# Altium PCB STM32.PcbDoc
Units mil, origin at the board's own origin, x right, y up, seen from the top; angles counter-clockwise.
Board outline 1555 x 1630 mil, 4 copper layers (Top Layer, Int1 (GND), Int2 (PWR), Bottom Layer), stack 61.662 mil thick; 36 components, 27 nets, 170 pads, 55 vias.
Unrouted connection lines stored in the file: 2.
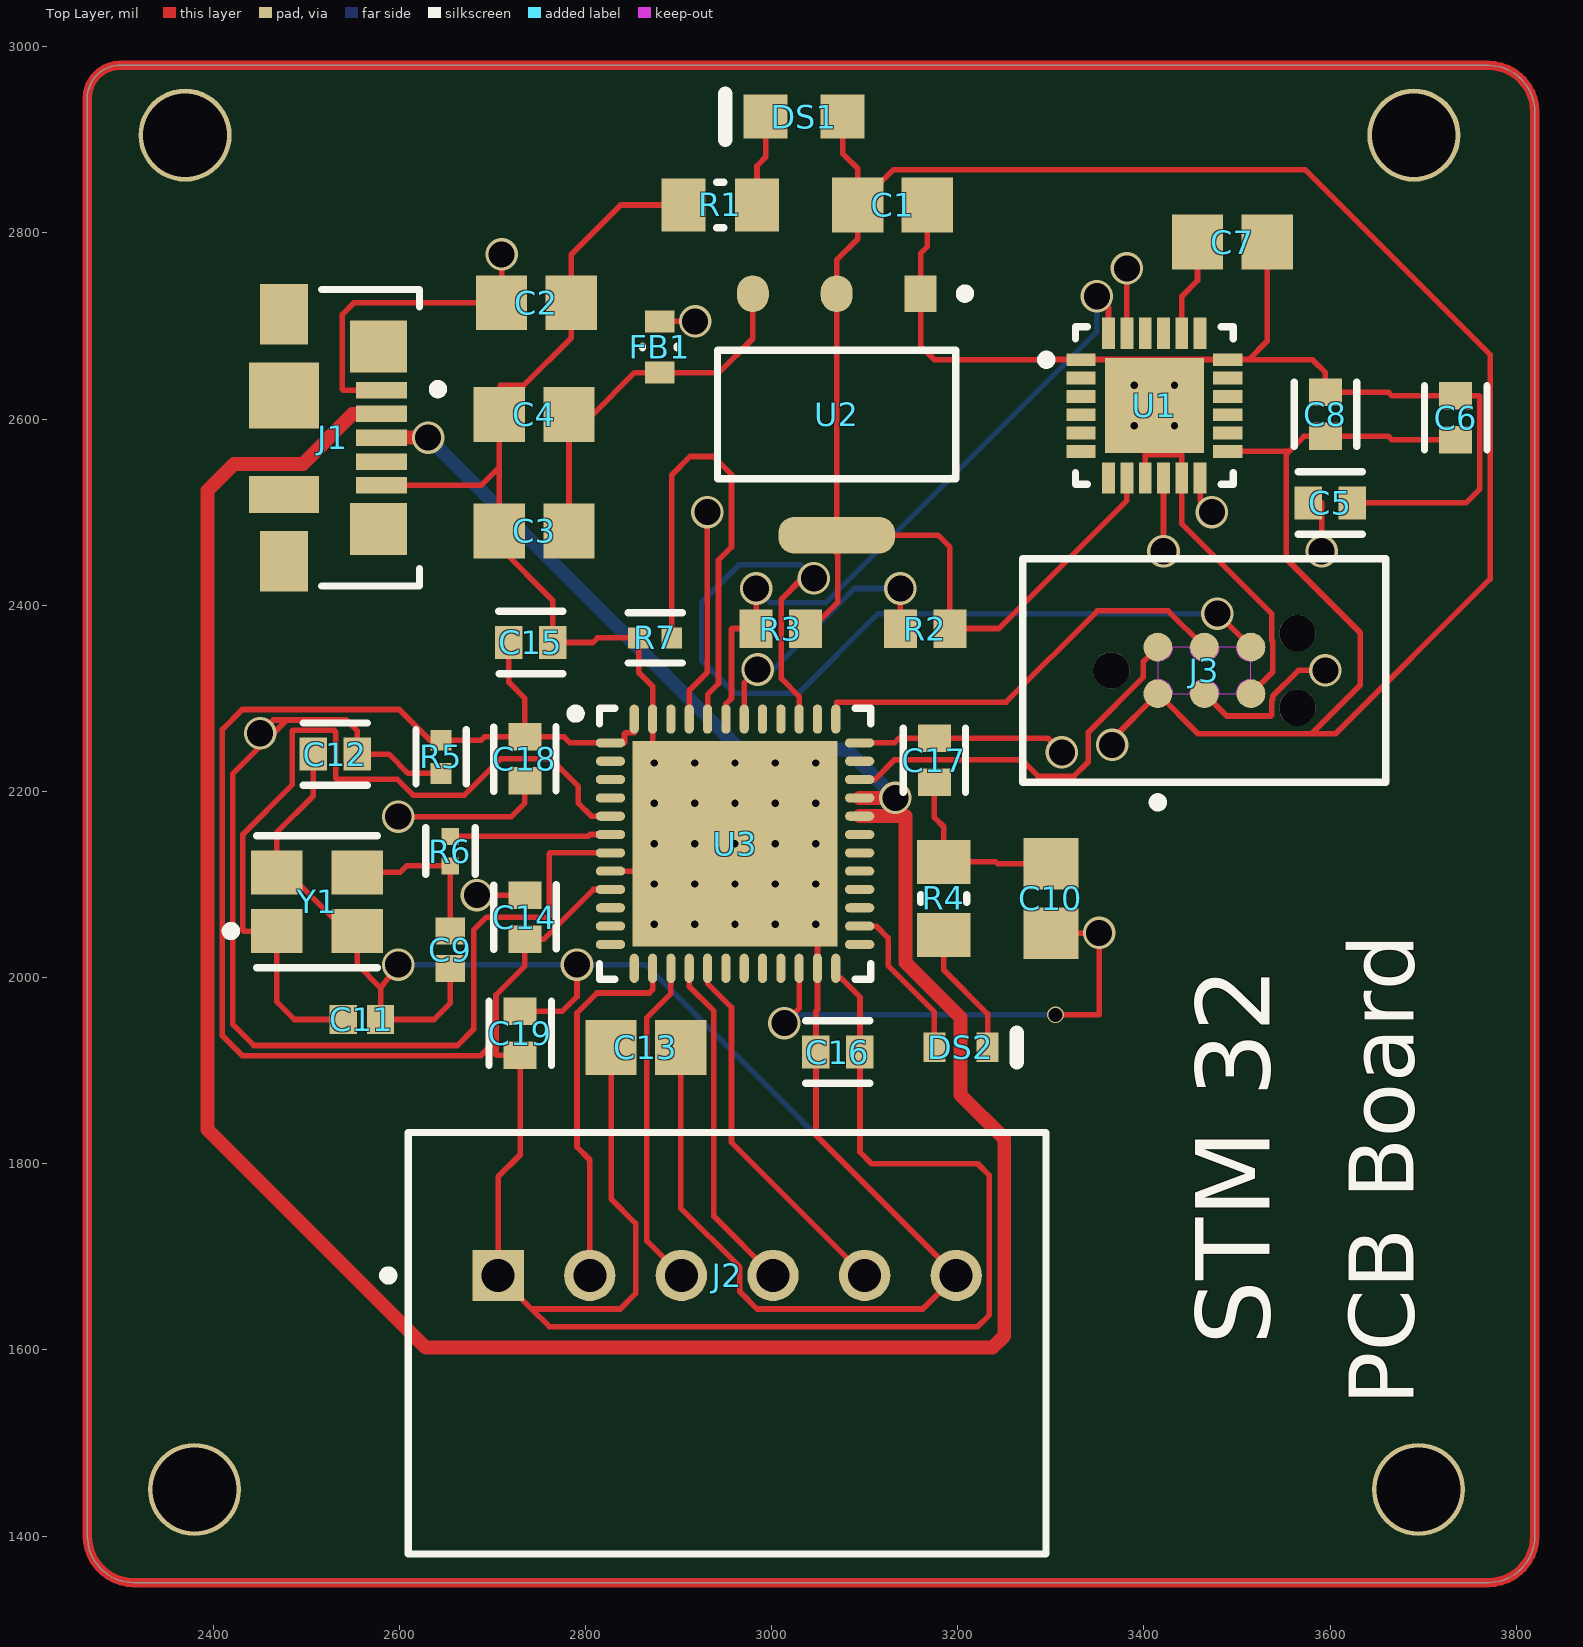
[diagram p0: Top Layer view]
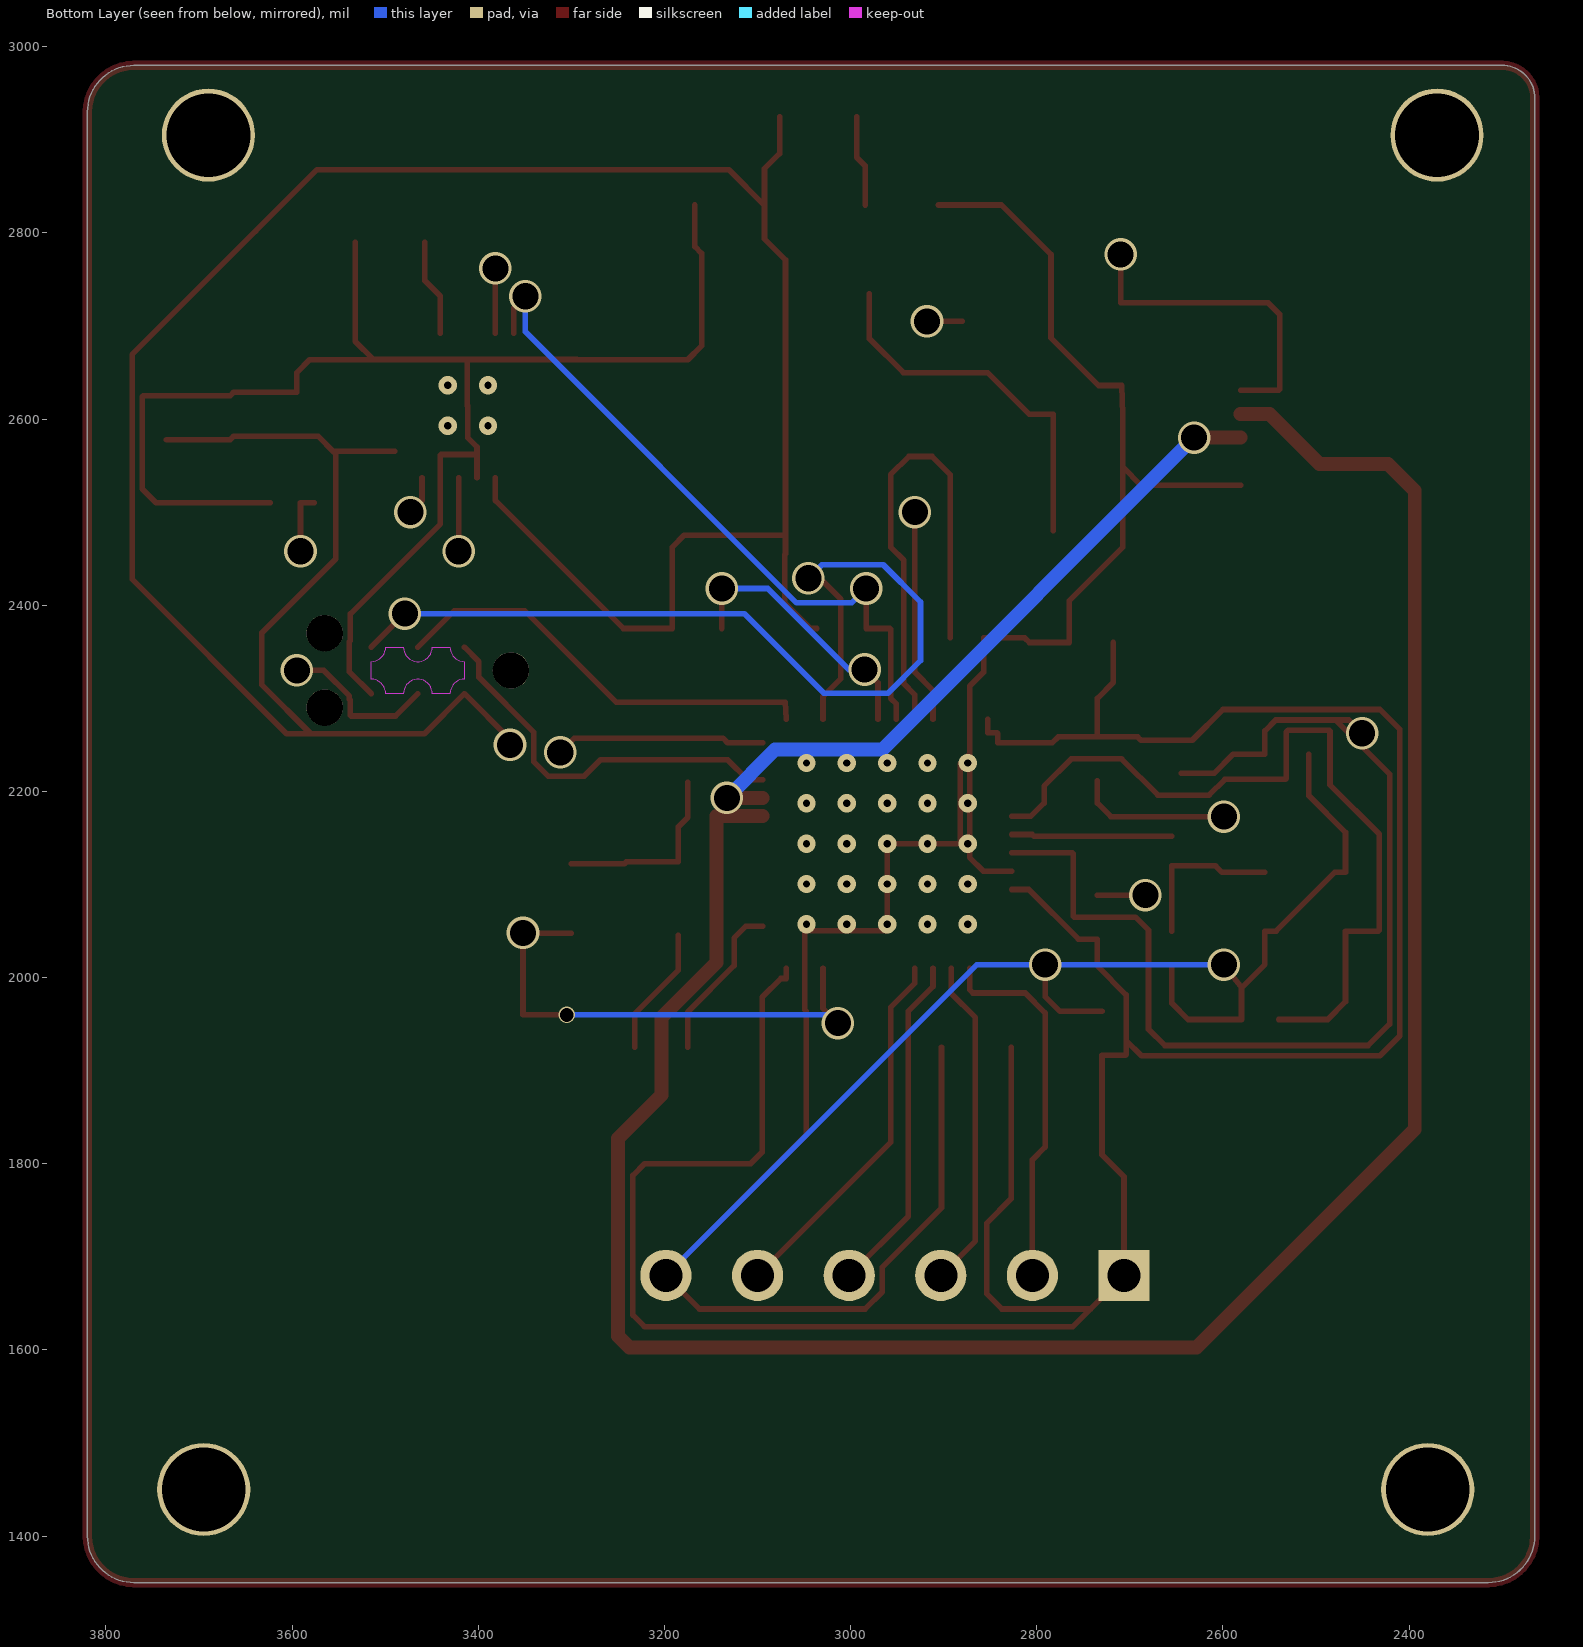
[diagram p1: Bottom Layer view, seen from below]
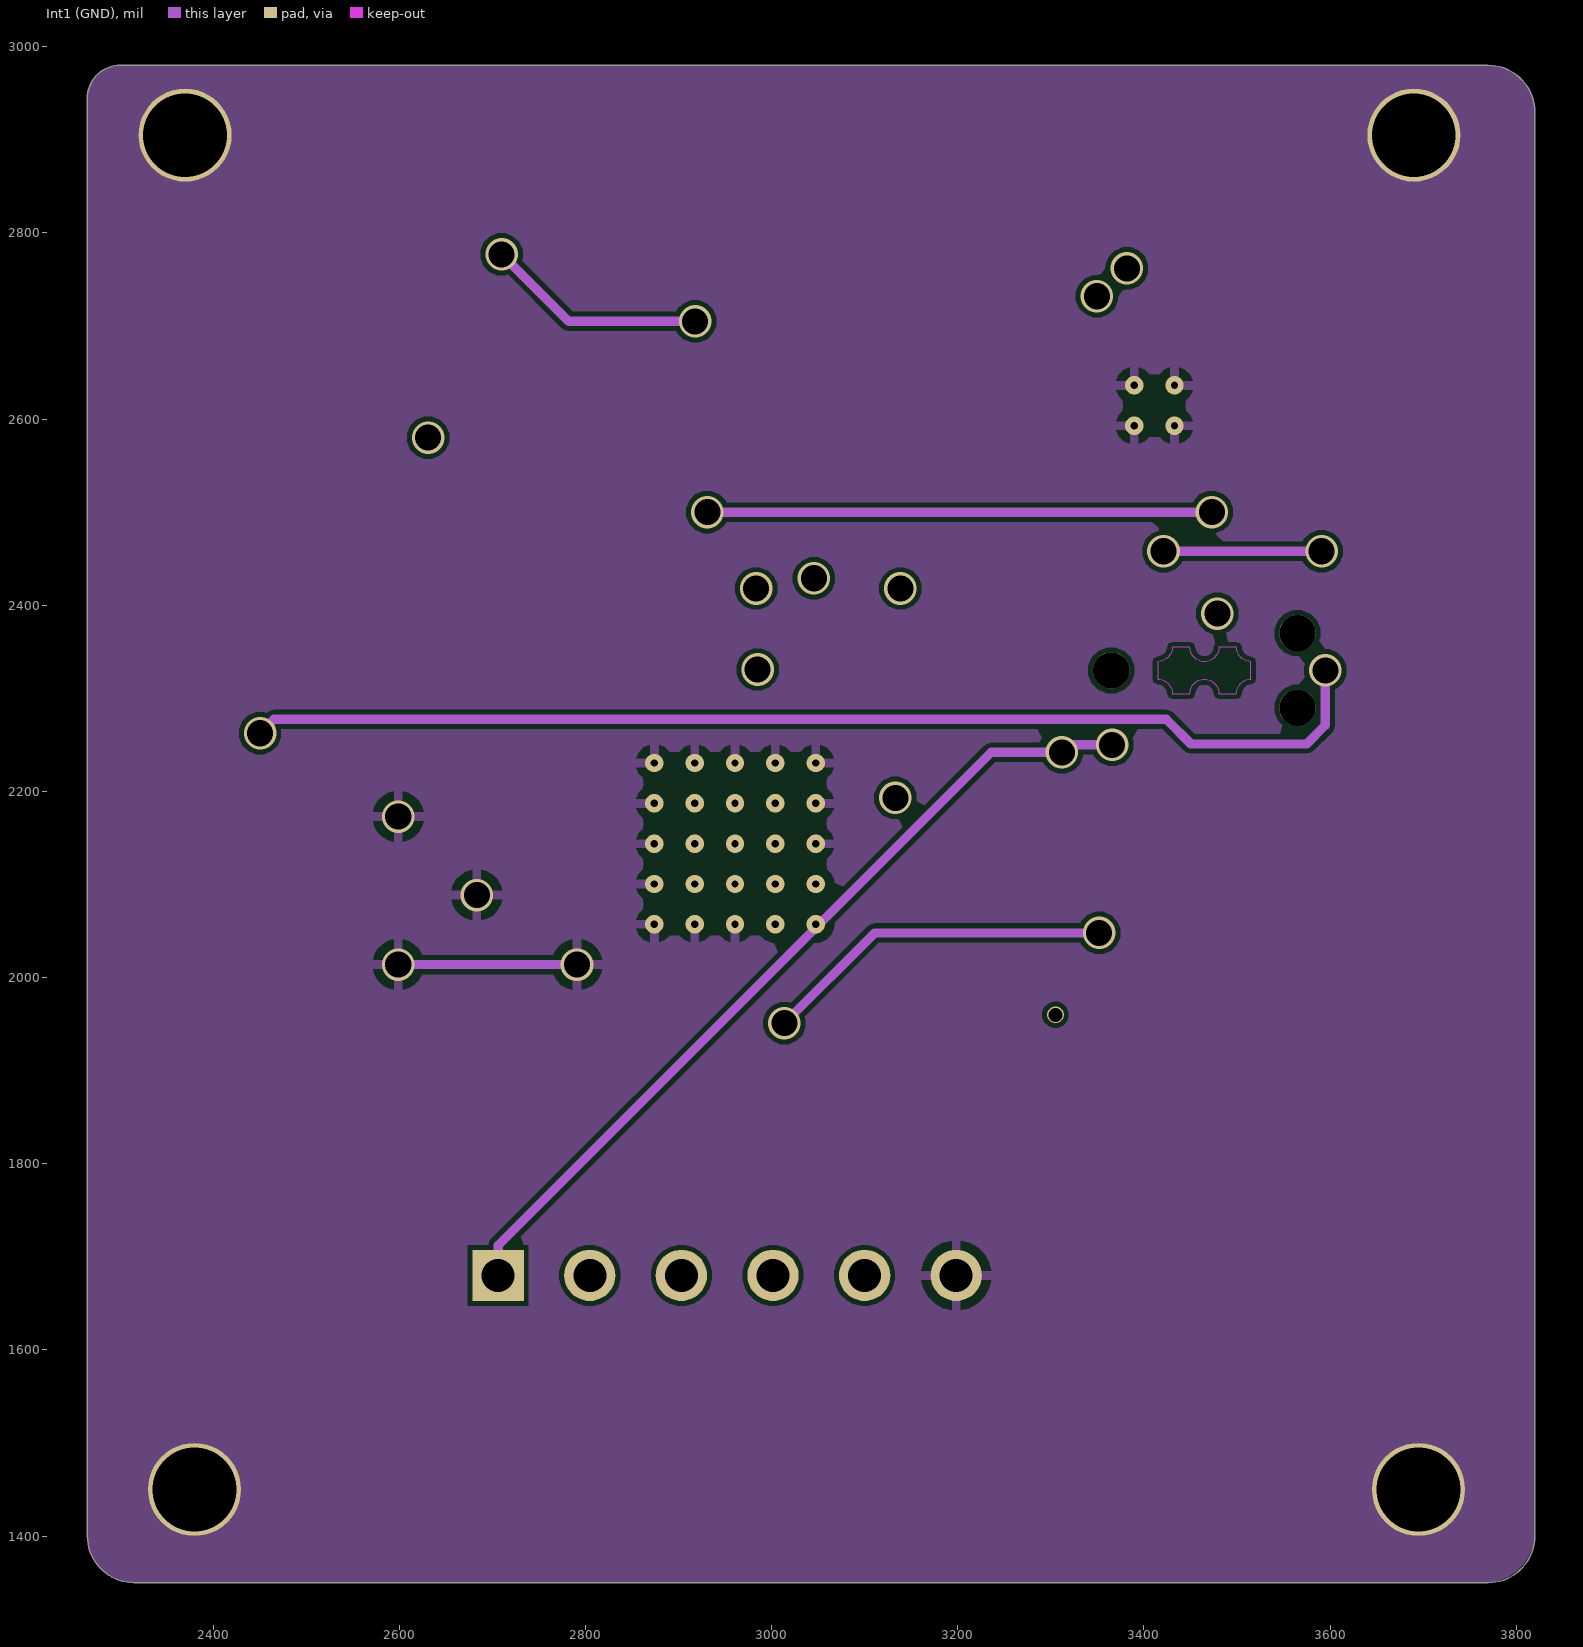
[diagram p2: Int1 (GND)]
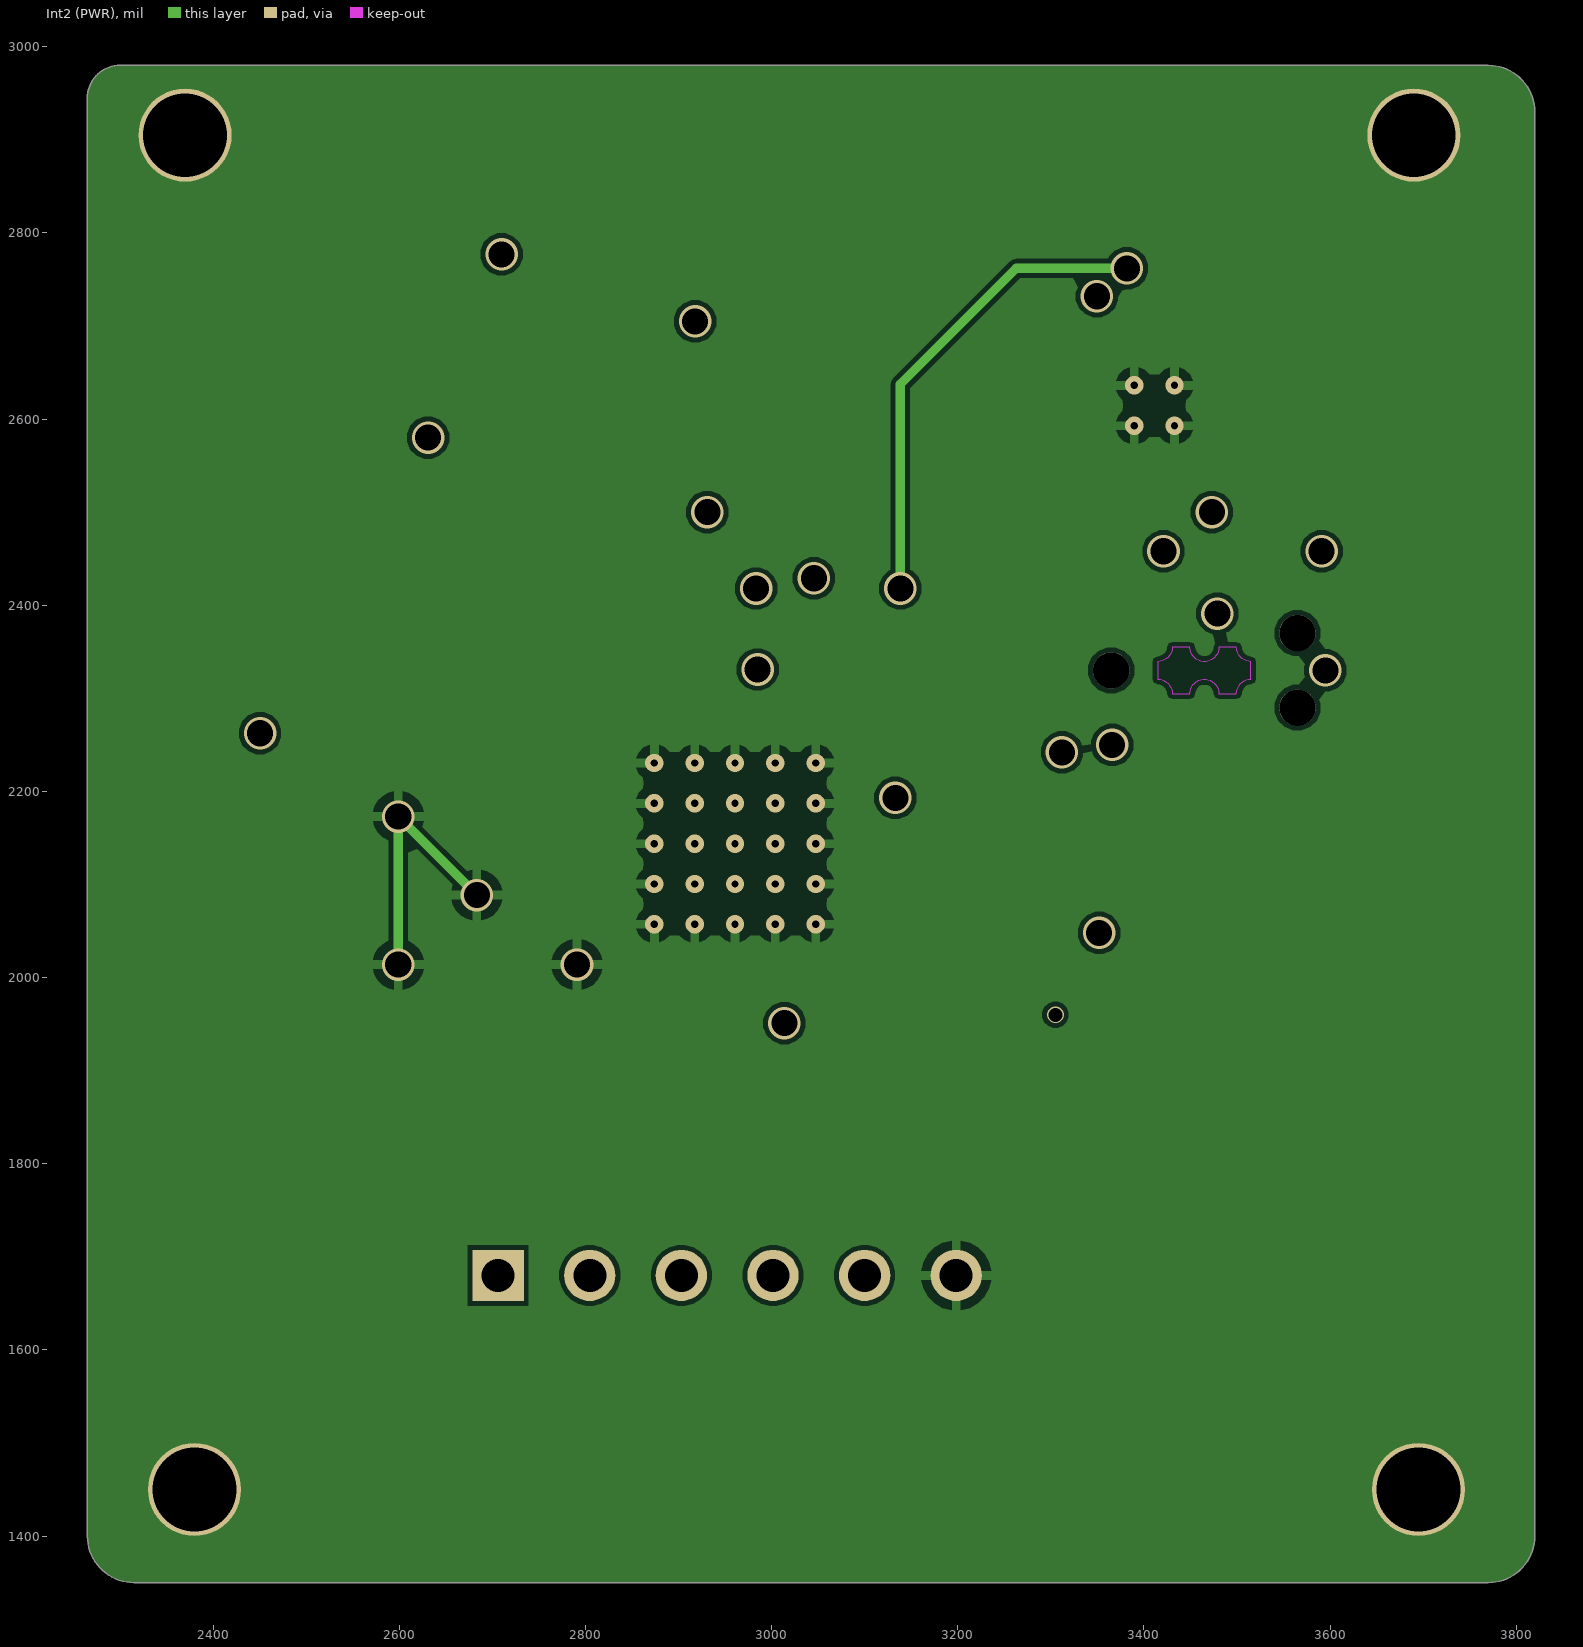
[diagram p3: Int2 (PWR)]
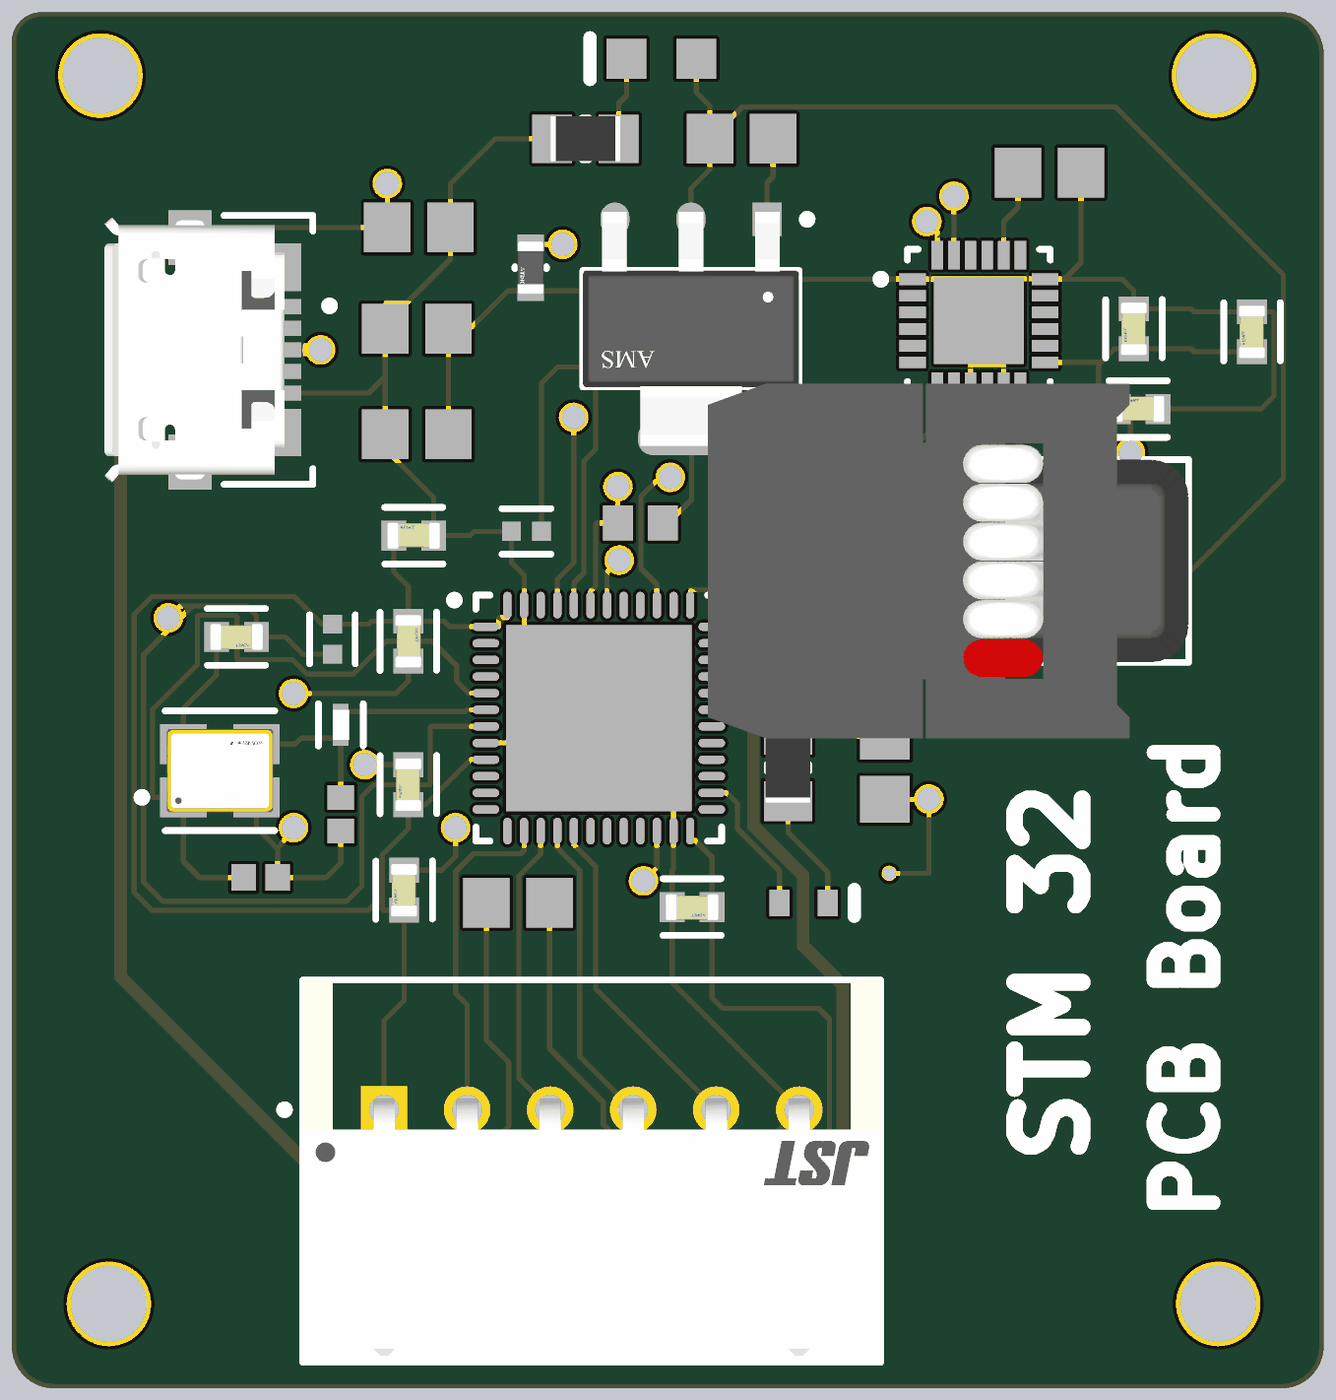
[diagram p4: 3D render of the assembled board from above, using the file's embedded part models]

## Layer stack, top to bottom
Top Solder: solder mask 1, SM-001, Dk 4
Top Layer: signal copper 1.378
Dielectric 1: prepreg 7.874, PP-017, Dk 4.6
Int1 (GND): signal copper 0.689
Dielectric 3: core 41.7795, Core-039, Dk 4.6
Int2 (PWR): signal copper 0.689
Dielectric 5: prepreg 7.874, PP-017, Dk 4.6
Bottom Layer: signal copper 1.378
Bottom Solder: solder mask 1, SM-001, Dk 4

## Board outline
2265,1400 2265,2945 cw(c2300,2945) 2300,2980 3770,2980 cw(c3770,2930) 3820,2930 3820,1400 cw(c3770,1400) 3770,1350 2315,1350 cw(c2315,1400)

## Design rules (kind name [scope] priority, off if disabled: settings)
Clearance [All] p1: gap=5 ignorepadtopadclearanceinfootprint=FALSE
DiffPairsRouting [All] p1: maxlimit=10 minlimit=10 mostfreqgap=10 toplayer_minwidth=15 toplayer_maxwidth=15 toplayer_prefwidth=15 midlayer1_minwidth=15 midlayer1_maxwidth=15 midlayer1_prefwidth=15 midlayer2_minwidth=15 midlayer2_maxwidth=15 midlayer2_prefwidth=15 bottomlayer_minwidth=15 bottomlayer_maxwidth=15 bottomlayer_prefwidth=15 maxuncoupledlength=10
PlaneConnect [All] p1: planeconnectstyle=Direct reliefexpansion=20 reliefentries=4 reliefconductorwidth=10 reliefairgap=10
PolygonConnect [All] p1: connectstyle=Relief reliefconductorwidth=10 reliefentries=4 polygonreliefangle="90 Angle" airgapwidth=10
RoutingVias [All] p1: holewidth=28 width=35 viastyle="Through Hole" minholewidth=4 minwidth=8 maxholewidth=15 maxwidth=18
ShortCircuit [All] p1: allowed=TRUE
SolderMaskExpansion [All] p1: expansion=4 istentingtop=FALSE
SupplyNets "Schematic Supply Nets_3" [InNet('GND')] p1: voltage=0.000
SupplyNets "Schematic Supply Nets_2" [InNet('VBUS')] p2: voltage=0.000
SupplyNets "Schematic Supply Nets_1" [InNet('+5')] p3: voltage=0.000
SupplyNets "Schematic Supply Nets" [InNet('+3')] p4: voltage=0.000
UnRoutedNet [All] p1: checkbadconnections=TRUE
Width [All] p1: maxlimit=10 minlimit=6 preferedwidth=10 toplayer_maxwidth=6 toplayer_prefwidth=6 midlayer1_minwidth=10 midlayer2_minwidth=10 bottomlayer_maxwidth=6 bottomlayer_prefwidth=6 minimp=50.000000 maximp=50.000000 favimp=50.000000
26 further rules are at their usual default settings.

## Classes and differential pairs
differential pair class DIFF_USB: USB_D
differential pair USB_D: +USB_D_P -USB_D_N

## Components (designator, comment, footprint, x,y, rotation, side; value= is the part's Value field where it differs from the comment)
C1 "2u2" CAPC2013X135X50ML10T20 3130,2830 r180 top
C2 "2u2" CAPC2013X135X50ML10T20 2747.4,2725 r180 top
C3 "2u2" CAPC2013X135X50ML10T20 2745,2480 r0 top
C4 "2u2" CAPC2013X135X50ML10T20 2745,2605 r0 top
C5 "100nF" FP-C0603C-CF-MFG 3600,2510 r0 top value="0.10 μF"
C6 "100nF" FP-C0603C-CF-MFG 3735,2601.38 r90 top value="0.10 μF"
C7 "2u2" CAPC2013X135X50ML10T20 3495,2790 r180 top
C8 "100nF" FP-C0603C-CF-MFG 3595,2605 r90 top value="0.10 μF"
C9 "10p" CAPC1006X50X20ML10T10 2655,2029.92 r90 top
C10 "2u2" CAPC2013X135X50ML10T20 3300,2085 r270 top
C11 "10p" CAPC1006X50X20ML10T10 2560,1955 r180 top
C12 "100nF" FP-C0603C-CF-MFG 2531.38,2240 r180 top value="0.10 μF"
C13 "2u2" CAPC2013X135X50ML10T20 2865,1925 r180 top
C14 "100nF" FP-C0603C-CF-MFG 2735,2065 r90 top value="0.10 μF"
C15 "100nF" FP-C0603C-CF-MFG 2741.38,2360 r0 top value="0.10 μF"
C16 "100nF" FP-C0603C-CF-MFG 3071.38,1920 r180 top value="0.10 μF"
C17 "100nF" FP-C0603C-CF-MFG 3175,2233.62 r270 top value="0.10 μF"
C18 "100nF" FP-C0603C-CF-MFG 2735,2235 r270 top value="0.10 μF"
C19 "100nF" FP-C0603C-CF-MFG 2730,1940 r90 top value="0.10 μF"
DS1 "HSMG-C170" AVAG-HSMX-C170_V 3035,2925 r180 top
DS2 "TLMS1100-GS08" VISH-TLMX1100_V 3203.54,1925 r0 top
FB1 "MMZ1608B121CTAH0" FP-MMZ1608-0_6-MFG 2880,2677.44 r270 top
J1 "473460001" FP-473460001-MFG 2490,2580 r270 top
J2 "S6B-XH-A-1(LF)(SN)" FP-S6B-XH-A-1_LF_SN-MFG 2952.36,1607.17 r180 top
J3 "TC2030-CTX-NL" FP-TC2030-CTX-NL-MFG 3465,2330 r0 top
R1 "1k" RESC2013X60X35ML10T20 2945,2830 r0 top
R2 "2k2" RESC1609X50X30ML10T20 3165,2375 r0 top
R3 "2k2" RESC1609X50X30ML10T20 3010,2375 r0 top
R4 "1k" RESC2013X60X35ML10T20 3185,2085 r90 top
R5 "10k" FP-CRCW0402-e3-IPC_B 2645,2237.2 r90 top
R6 "0k" FP-CRCW0402-e3-IPC_C 2655,2135.83 r90 top
R7 "10k" FP-CRCW0402-e3-IPC_B 2875,2365 r0 top
U1 "MPU-6050" IS-QFN-24_V 3411.26,2614.53 r0 top
U2 "AMS1117-3.3" FP-AMS1117-IPC_C 3070,2605 r270 top
U3 "STM32F411CEU6" STM-UFQFPN48_L 2960.79,2143.86 r0 top
Y1 "ABM8AIG-24.000MHZ-12-2Z-T3" FP-ABM8AIG-MFG 2511.69,2081.5 r0 top

## Footprints (in the part's own frame and the unit in brackets; to place one, negate y for a bottom-side part, rotate by r counter-clockwise, add the part's x,y. Pads: shape width x height; smd on the part's side, far side on the other; paste and mask are expansions set on the pad)
AVAG-HSMX-C170_V [mm] "SMD, 2-Leads, Body 2x1.25mm, Height 0.8mm"
  rect 1.2x1.2 smd: 1(-1.05,0) 2(1.05,0)
  silkscreen extent 2.15,-0.62 2.15,0.62, body extent -1,-0.63 1,0.63, height 0.8
CAPC1006X50X20ML10T10 [mm] "Chip Capacitor, 2-Leads, Body 1.00x0.55mm, IPC Low Density"
  rect 0.74x0.8 smd: 1(-0.51,0) 2(0.51,0)
  body extent -0.55,-0.33 0.55,0.32, height 0.5
CAPC2013X135X50ML10T20 [mm] "Chip Capacitor, 2-Leads, Body 2.00x1.25mm, IPC Low Density"
  rect 1.4x1.5 smd: 1(-0.95,0) 2(0.95,0)
  body extent -1.05,-0.67 1.05,0.67, height 1.35
FP-473460001-MFG [mm]
  rect 0.45x1.38 smd paste+0 mask+0: 1(-1.3,2.31) 2(-0.65,2.31) 3(0,2.31) 4(0.65,2.31) 5(1.3,2.31)
  rect 1.425x1.55 smd paste+0 mask+0: 6(-2.488,2.225) 7(2.488,2.225)
  rect 1.65x1.3 smd paste+0 mask+0: 8(-3.375,-0.35) 11(3.375,-0.35)
  rect 1.8x1.9 smd paste+0 mask+0: 9(-1.15,-0.35)
  rect 1x1.9 smd paste+0 mask+0: 10(1.55,-0.35)
  silkscreen extent -4.05,0.67 4.05,3.98, body extent -4.3,-2.48 4.3,3.45, height 0.25
FP-ABM8AIG-MFG [mm]
  rect 1.4x1.2 smd paste+0 mask+0: 1(-1.1,-0.8) 2(1.1,-0.8) 3(1.1,0.8) 4(-1.1,0.8)
  silkscreen extent -2.47,-1.8 1.65,1.8, body extent -1.9,-1.5 1.9,1.5, height 0.25
FP-AMS1117-IPC_C [mm]
  rect 1.004x0.872 smd paste+0 mask+0: 1(-3.295,2.29)
  rrect100% 1.004x0.872 smd paste+0 mask+0: 2(-3.295,0) 3(-3.295,-2.29)
  rrect87% 1.004x3.182 smd paste+0 mask+0: 4(3.295,0)
  silkscreen extent -3.42,-3.25 1.75,3.63, body extent -3.9,-3.35 3.9,3.35, height 0.25
FP-C0603C-CF-MFG [mm]
  rect 0.75x0.9 smd paste+0 mask+0: 1(-0.6,0) 2(0.6,0)
  silkscreen extent -0.87,-0.85 0.88,0.85, body extent -1.2,-0.6 1.2,0.6, height 0.25
FP-CRCW0402-e3-IPC_B [mil]
  rect 22.37x22.54 smd paste+0 mask+0: 1(-17.8,0) 2(17.8,0)
  silkscreen extent -29,-27 29,27
FP-CRCW0402-e3-IPC_C [mil]
  rect 18.43x18.6 smd paste+0 mask+0: 1(-15.83,0) 2(15.83,0)
  silkscreen extent -25,-27 25,27, body extent -29,-15 29,15, height 10
FP-MMZ1608-0_6-MFG [mm]
  rect 0.6x0.8 smd paste+0 mask+0: 1(-0.7,0) 2(0.7,0)
  silkscreen extent -0.03,-0.47 0.03,0.47, body extent -1.1,-0.58 1.1,0.58, height 0.25
FP-S6B-XH-A-1_LF_SN-MFG [mm]
  rect 1.4x1.4 hole 0.9 paste-2539.97 mask+0: 1(6.25,-1.85)
  round 1.4 hole 0.9 paste-2539.97 mask+0: 2(3.75,-1.85) 3(1.25,-1.85) 4(-1.25,-1.85) 5(-3.75,-1.85) 6(-6.25,-1.85)
  silkscreen extent -8.7,-5.75 9.37,5.75, body extent -8.8,-5.85 8.8,5.85, height 0.25
FP-TC2030-CTX-NL-MFG [mil]
  round 30.98 smd paste-39370.1 mask+0: 1(-50,-25) 2(-50,25) 3(0,-25) 4(0,25) 5(50,-25) 6(50,25)
  round 39.02 hole 39.02 unplated paste-99999 mask+0: ""(-100,0) ""(100,-40) ""(100,40)
  Keep-Out Layer region: -34.51,-25 -15.49,-25 -13.96,-18.28 -9.66,-12.89 -3.45,-9.9 3.45,-9.9 9.66,-12.89 13.96,-18.28 15.49,-25 15.49,-25 34.51,-25 35.69,-19.07 39.05,-14.05 44.07,-10.69 50,-9.51 50,-9.51 50,9.51 44.07,10.69 39.05,14.05 35.69,19.07 34.51,25 34.51,25 15.49,25 13.96,18.28 9.66,12.89 3.45,9.9 -3.45,9.9 -9.66,12.89 -13.96,18.28 -15.49,25 -15.49,25 -34.51,25 -35.69,19.07 -39.05,14.05 -44.07,10.69 -50,9.51 -50,9.51 -50,-9.51 -44.07,-10.69 -39.05,-14.05 -35.69,-19.07 -34.51,-25
  silkscreen extent -195,-147 195,120, body extent -199,-124 199,124, height 10
IS-QFN-24_V [mm] "QFN, 24-Leads, Body 4x4mm, Pitch 0.5mm, Thermal Pad 2.7x2.6mm"
  rect 0.8x0.35 smd: 1(-2,1.25) 2(-2,0.75) 3(-2,0.25) 4(-2,-0.25) 5(-2,-0.75) 6(-2,-1.25) 13(2,-1.25) 14(2,-0.75) 15(2,-0.25) 16(2,0.25) 17(2,0.75) 18(2,1.25)
  rect 0.35x0.85 smd mask+0.102: 7(-1.25,-1.975) 8(-0.75,-1.975) 9(-0.25,-1.975) 10(0.25,-1.975) 11(0.75,-1.975) 12(1.25,-1.975) 19(1.25,1.975) 20(0.75,1.975) 21(0.25,1.975) 22(-0.25,1.975) 23(-0.75,1.975) 24(-1.25,1.975)
  rect 2.7x2.6 smd: 25(0,0)
  silkscreen extent -3.07,-2.15 2.15,2.15, body extent -2,-2 2,2, height 0.95
RESC1609X50X30ML10T20 [mm] "Chip Resistor, 2-Leads, Body 1.55x0.85mm, IPC Low Density"
  rect 0.9x1.05 smd: 1(-0.675,0) 2(0.675,0)
  body extent -0.82,-0.48 0.82,0.48, height 0.5
RESC2013X60X35ML10T20 [mm] "Chip Resistor, 2-Leads, Body 2.1x1.35mm, IPC Low Density"
  rect 1.2x1.45 smd: 1(-1,0) 2(1,0)
  silkscreen extent -0.1,-0.62 0.1,0.62, body extent -1.05,-0.68 1.05,0.67, height 0.6
STM-UFQFPN48_L [mm] "QFN, 48-Leads, Body 7.1x7.1mm, Pitch 0.5mm, Thermal Pad 5.6x5.6mm, IPC High Density"
  oval 0.8x0.25 smd: 1(-3.4,2.75) 2(-3.4,2.25) 3(-3.4,1.75) 4(-3.4,1.25) 5(-3.4,0.75) 6(-3.4,0.25) 7(-3.4,-0.25) 8(-3.4,-0.75) 9(-3.4,-1.25) 10(-3.4,-1.75) 11(-3.4,-2.25) 12(-3.4,-2.75) 25(3.4,-2.75) 26(3.4,-2.25) 27(3.4,-1.75) 28(3.4,-1.25) 29(3.4,-0.75) 30(3.4,-0.25) 31(3.4,0.25) 32(3.4,0.75) 33(3.4,1.25) 34(3.4,1.75) 35(3.4,2.25) 36(3.4,2.75)
  oval 0.25x0.8 smd: 13(-2.75,-3.4) 14(-2.25,-3.4) 15(-1.75,-3.4) 16(-1.25,-3.4) 17(-0.75,-3.4) 18(-0.25,-3.4) 19(0.25,-3.4) 20(0.75,-3.4) 21(1.25,-3.4) 22(1.75,-3.4) 23(2.25,-3.4) 24(2.75,-3.4) 37(2.75,3.4) 38(2.25,3.4) 39(1.75,3.4) 40(1.25,3.4) 41(0.75,3.4) 42(0.25,3.4) 43(-0.25,3.4) 44(-0.75,3.4) 45(-1.25,3.4) 46(-1.75,3.4) 47(-2.25,3.4) 48(-2.75,3.4)
  rect 5.6x5.6 smd: 49(0,0)
  silkscreen extent -4.47,-3.7 3.7,3.7, body extent -3.55,-3.55 3.55,3.55, height 0.6
VISH-TLMX1100_V [mm] "SMD, 2-Leads, Body 1.6x0.8mm"
  rect 0.6x0.8 smd: 1(-0.725,0) 2(0.725,0)
  silkscreen extent 1.52,-0.4 1.52,0.4, body extent -0.8,-0.4 0.8,0.4, height 0.65

## Part data
C1 C2 C3 C4 C7 C10 C13: library part CMP-2007-03455-1, Manufacturer=Murata, Part Number=GRM21BR71C225KA12L
C5 C6 C8 C12 C14 C15 C16 C17 C18 C19: library part CMP-2006-03811-3, "Capacitor; Ceramic; Cap; .100uF; Tol 10%; SMT; Vol-Rtg 16V; X7R; Tape and Reel", Capacitance="0.10 μF", Manufacturer=KEMET, Manufacturer Part Number=C0603C104K4RACTU, Package=C0603C-CF, Temperature="-55°C to +125°C", Temperature Characteristic=X7R, Temperature Coefficient=30ppm/°C, Temperature Range High=+125°C, Temperature Range Low=-55°C, Tolerance=0.1, Voltage Rating="16 V", Automotive=Yes, Automotive Grade="Grade 1", Category=Cap, ComponentLink2Description=Datasheet, ComponentLink2URL=https://api.kemet.com/component-edge/download/datasheet/C0603C100J5GACAUTO.pdf, Device Class L1="Passive Components", Device Class L2=Capacitors, Device Class L3="Ceramic Capacitors", Digikey Description="Capacitor; Ceramic; Cap; .100uF; Tol 10%; SMT; Vol-Rtg 16V; X7R; Tape and Reel", Height=0.87mm, Lead Free=Yes, Material=Ceramic, Mouser Description="Multilayer Ceramic Capacitors MLCC - SMD/SMT 16volts 0.1uF 10% X7R 10%", Octopart=https://octopart.com/c0603c104k4ractu-kemet-93067, RoHS=TRUE
C9 C11: library part CMP-2008-04829-1, Manufacturer="AVX Interconnect / Elco", Part Number=0402YJ100FBSTR
DS1: library part CMP-2000-05062-1, "Chip LED, Green, 2.2 V, -40 to 85 degC, 2-Pin SMD, Pb-Free, Tape and Reel", Forward Current If=20mA, Forward Voltage=2.2V, Forward Voltage VF Max=2.6V, LED Colour=Green, Manufacturer=Avago, Operating Temperature Max=85degC, Operating Temperature Min=-30degC, Operating Temperature Range=-30degCto+85degC, Opto Case Style=SMD, Package Description="2-Pin Surface Mount Device, Body 2 x 1.25 mm, Height 0.8 mm", Package Reference=HSMX-C170, Storage Temperature Min=-40degC, Bulb Size=1.25mmx1.4mm, Datasheet URL=https://datasheet.ciiva.com/29280/180495-da-01-en-chip-led-hsmg-c170-gelb-gruen-29280971.pdf, Datasheet Version=Oct-08, Dominant Wavelength=572nm, Dominant Wavelength Typ=572nm, External Depth=0.8mm, External Length / Height=2mm, External Width=1.25mm, Forward Current If Max=20mA, LED Mounting=SMD, LED Type=Standard, Lens Shape=Rectangular, Light Area Height=1mm, Luminous Intensity=15mcd, Luminous Intensity Min=4mcd, Luminous Intensity Typ=15mcd, Manufacturer URL=http://www.avagotech.com/, Mounting Type=SMD, MSL=MSL2A-4weeks, No. of Pins=2, Opto Mounting Orientation=Top, Packaging=CutTape, Peak Forward Current=20mA, Peak Wavelength=570nm, PIV Max=5V, Storage Temperature Max=85degC, SVHC=NoSVHC(16-Jun-2014), Viewing Angle=170deg, Voltage Vf Typ=2.2V, Wavelength Typ=570nm
DS2: library part CMP-1666-00027-1, "LED, RED, 2.1 V, -40 to 100 degC, 2-Pin SMD (0603), RoHS, Tape and Reel", Capacitance="12 pF", Case Code (Imperial)=0603, Case Code (Metric)=1608, Max Operating Temperature=125degC, Min Operating Temperature=-55degC, Package Quantity=4000, Resistance="100000000000 Ohm", Tolerance=5%, Type (Capacitors)=C0G, Voltage Rating="50 V", Case/Package=0603, ComponentLink1Description="Manufacturer URL", ComponentLink1URL=http://www.vishay.com/, ComponentLink2Description=Datasheet, ComponentLink2URL=http://www.vishay.com/docs/83173/tlmb1100.pdf, DatasheetVersion="Rev. 2.7, 03/2016", Height="0.8 mm", Length="1.6 mm", Mount="Surface Mount", PackageDescription="2-Pin Surface Mount Device, Body 1.6 x 0.8 mm", PackageReference=TLMX1100, Packaging="Tape and Reel", Pins=2, Radiation Hardening=No, REACH SVHC="No SVHC", RoHSCompliant=True, Voltage Rating (DC)="50 V", Width="0.8 mm"
FB1: library part CMP-08257-000037-1, "FERRITE BEAD 120 OHM 0603 1LN", Case Code (Imperial)=0603, Case Code (Metric)=1608, Current Rating=600mA, DC Resistance (DCR)=150mR, Package Quantity=4000, Tolerance=25%, Case/Package=0603, Core Material=Ferrite, Depth=0.8mm, Height=0.03inch, Impedance=120R, Length=0.063inch, Max DC Current=600mA, Mount="Surface Mount", Packaging="Cut Tape", REACH SVHC="No SVHC", RoHS Compliant=Yes, Width=0.031inch
J1: library part CMP-2000-05246-2, "CONN RCPT USB2.0 MICRO B SMD R/A", Current Rating=1.8A, Manufacturer=Molex, Package=0, Temperature="-30°C to +85°C", Temperature Range High=+85°C, Temperature Range Low=-30°C, Voltage Rating=30V, Automotive=No, Category=Conn, ComponentLink2Description=Datasheet, ComponentLink2URL=https://www.molex.com/webdocs/datasheets/pdf/en-us/0473460001_IO_CONNECTORS.pdf, Conn Orientation="Right Angle", Contact Material=Gold,Nickel, Device Class L1=Connectors, Device Class L2="USB Connectors", Device Class L3=unset, Digikey Description="CONN RCPT USB2.0 MICRO B SMD R/A", Footprint Url=https://www.molex.com/pdm_docs/sd/473460001_sd.pdf, Height=2.945mm, Is Female=yes, Lead Free=Yes, Manufacturer Part Number=473460001, Number Of Contacts=5, Octopart=https://octopart.com/47346-0001-molex-7164928, Pitch=0.65mm, RoHS=TRUE, Shielding=true, Usb Standard="USB 2.0"
J2: library part CMP-17439-000023-1, "CONN HEADER R/A P6OS 2.5MM", Color=Natural, Current Rating=3A, Insulation Resistance=1GR, Max Operating Temperature=85°C, Min Operating Temperature=-25°C, Voltage Rating=250V, Contact Material=Brass, Contact Plating=Tin, Gender=Male, Lead Free="Lead Free", Material=Polyamide, Mount="Through Hole", Number of Positions=6, Number of Rows=1, Pitch=2.5mm, Termination=Crimp
J3: library part CMP-205963-000001-1, "6-Pin “No legs” TC2030 Plug-of-Nails™ Cable for use with ARM Cortex processors"
R1 R4: library part CMP-2100-03671-1, "Chip Resistor, 1 KOhm, +/- 1%, 125 mW, -55 to 155 degC, 0805 (2012 Metric), RoHS, Tape and Reel", Case Code (Imperial)=0805, Case Code (Metric)=2012, Manufacturer=Yageo, Max Operating Temperature=155degC, Max Power Dissipation=125mW, Min Operating Temperature=-55degC, Package Description="2-Pin Surface Mounted Device, Body 2 x 1.25 mm", Package Quantity=1, Resistance=1KOhm, Temperature Coefficient=100ppm/degreesC, Tolerance=1%, Voltage Rating=150V, Case/Package=0805, Composition=ThickFilm, Datasheet URL=http://www.yageo.com/NewPortal/yageodocoutput?fileName=/pdf/R-Chip/PYu-RC_Group_51_RoHS_L_5.pdf, Datasheet Version="Rev. 5, 10/2016", Depth=1.25mm, Height=0.024inch, Lead Free=LeadFree, Length=0.079inch, Manufacturer URL=http://www.yageo.com/, Military Standard=Not, Number of Pins=2, Number of Terminations=2, Package Reference=0805, Packaging=TapeandReel, Power Rating=125mW, REACH SVHC=Unknown, RoHSCompliant=true, Termination=SMD/SMT, Voltage Rating (DC)=150V, Width=0.049inch
R2 R3: library part CMP-2000-03206-1, Manufacturer="Vishay Dale", Part Number=CRCW06032R20FKEA
R5 R7: library part CMP-2002-08135-2, "RES SMD 10K OHM 1% 1/16W 0402", Case Code (Imperial)=0402, Case Code (Metric)=1005, Max Operating Temperature=155°C, Max Power Dissipation=63mW, Min Operating Temperature=-55°C, Package Quantity=10, Resistance=10kR, Temperature Coefficient=100ppm/°C, Tolerance=1%, Voltage Rating=50V, Case/Package=0402, Composition="Thick Film", Contact Plating=Tin, Depth=0.5mm, Features="Automotive AEC-Q200", Height=0.35mm, Lead Free="Lead Free", Length=1mm, Military Standard=Not, Mount="Surface Mount", Number of Pins=2, Number of Terminations=2, Packaging="Tape and Reel", Power Rating=63mW, Radiation Hardening=No, Termination=SMD/SMT, Voltage Rating (DC)=50V, Weight=2.3E-05oz, Width=0.02inch
R6: library part CMP-2002-08122-2, "RES Thick Film, 0Ω, 0.063W, 0402", Case Code (Imperial)=0402, Case Code (Metric)=1005, Max Operating Temperature=155°C, Max Power Dissipation=63mW, Min Operating Temperature=-55°C, Package Quantity=1, Resistance=0mR, Temperature Coefficient=100ppm/°C, Tolerance=5%, Voltage Rating=50V, Case/Package=0402, Composition="Thick Film", Contact Plating=Tin, Depth=0.5mm, Features="Automotive AEC-Q200", Height=0.35mm, Lead Free="Lead Free", Length=1mm, Military Standard=Not, Mount="Surface Mount", Number of Terminations=2, Packaging="Tape and Reel", Power Rating=63mW, Radiation Hardening=No, Termination=SMD/SMT, Voltage Rating (DC)=50V, Weight=2.3E-05oz, Width=0.5mm
U1: library part CMP-1753-00002-2, "3-Axis Gyroscope, Accelerometer and a Digital Motion Processor(TM) (DMP), 2.375 to 3.46 V, -40 to 85 degC, 24-Pin QFN, RoHS, Tape and Reel", Manufacturer=InvenSense, Standard Package=5,000, Category=Sensors,Transducers, Datasheet URL=http://datasheet.octopart.com/MPU-6050-InvenSense-datasheet-14421344.pdf, Datasheet Version="Rev. 3.3, 05/2012", Dynamic Catalog=MPU-6000™Series, Family=Multifunction, Featured Product=MPU-60506-Axis,IntegratedI²CSolution, Manufacturer URL=http://www.invensense.com/, Online Catalog=MPU-6000™Series, Other Names="1428-1007-2 / MPU6050", Output Type=Digital, Sensor Type=MotionTracking, Unit PriceUSD=Digital
U2: library part CMP-209535-000001-1, "LDO Voltage Regulators 1A, 3.3V", Dropout Voltage=1.1V, Manufacturer="Advanced Monolithic Systems", Max Junction Temp=+125°C, Max Power Dissipation=1.2W, Max Supply Voltage=15V, Nominal Supply Current=5mA, Output Current=1A, Output Voltage=3.3V, Package=AMS1117, Temperature="-40°C to +125°C", Temperature Range Low=-40°C, Automotive=No, Category=IC, ComponentLink2Description=Datasheet, ComponentLink2URL=http://www.advanced-monolithic.com/pdf/ds1117.pdf, Device Class L1="Integrated Circuits (ICs)", Device Class L2="Power Management ICs", Device Class L3="Voltage Regulators - Linear", Height=1.8mm, Ipc Land Pattern Name=SOT229P700X180-4, Lead Free=Yes, Manufacturer Part Number=AMS1117-3.3, Number Of Outputs=1, Octopart=https://octopart.com/ams1117-3.3-advanced+monolithic+systems-25899300, Output Type=Fixed, RoHS=TRUE, Standoff Height=0.64mm, Temperature Range High=+125°C
U3: library part CMP-0243-00165-1, "ARM Cortex-M4 32-bit MCU+FPU, 512 KB Flash, 128 KB RAM, 36 I/Os, 48-Pin UFQFPN, -40 to 85 degC, Tray", I/Os (High Current)=36, Operating Frequency(F) (Processor speed) (MHz)=100, Package Description=UFQFPN48, Package Reference="48-Pin Ultra Thin Fine Pitch Quad Flat No-Lead, 7 x 7 x 0.6 mm Body, 0.5 mm Pitch, Exposed Pad", Supply Voltage(Vcc) min (V)=1.7, ComponentLink1Description="Manufacturer URL", ComponentLink1URL=http://www.st.com/, ComponentLink2Description=Datasheet, ComponentLink2URL=http://www.st.com/st-web-ui/static/active/en/resource/technical/document/datasheet/DM00115249.pdf, Core="ARM Cortex-M4", DatasheetVersion="Rev. 6", FLASH Size (Prog) (kB)=512, Internal RAM Size (kB)=128, Mounting Technology="Surface Mount", Packing=Tray
Y1: library part CMP-27762-015716-1, "Crystal 24MHz ±20ppm (Tol) ±50ppm (Stability) 12pF FUND 50Ω Automotive 4-Pin Ultra Mini-CSMD T/R", Case/Package=SMD/SMT, ESR (Equivalent Series Resistance)=50R, Frequency=24MHz, Frequency Stability=50ppm, Frequency Tolerance=20ppm, Load Capacitance=12pF, Max Operating Temperature=125°C, Min Operating Temperature=-40°C, Ratings=AEC-Q200, Height=0.031inch, Length=0.126inch, Mount="Surface Mount", Packaging="Cut Tape", RoHS Compliant=Yes, Series=ABM8AIG, Width=0.098inch

## Free pads (board coordinates)
  round 100 hole 90: 2(2370,2905) 3(3690,2905) 4(3695,1450) 5(2380,1450)

## Via types
v1: diameter 19.68, hole 7.87, Top Layer to Bottom Layer, 29 vias
v2: diameter 35, hole 28, Top Layer to Bottom Layer, 25 vias
v3: diameter 18, hole 15, Top Layer to Bottom Layer, 1 vias

## Nets (pads, with @x,y where several pads share a name; then routed paths per layer and width w, separated by ;. In a path a pad name is that pad's centre, name@x,y a point inside that pad or via, vN(x,y) a via of type N, cw(c..) or ccw(c..) an arc to the next point about the centre after c; other vN are vias at no path point)
+3: C1.2 C6.1 C8.1 C13.2 C14.1 C15.1 C16.1 C17.1 C18.1 C19.1 DS1.1 J2.1 J3.1 R2.2 R3.2 R5.2 U1.8 U1.13 U2.2 U2.4 U3.1 U3.9 U3.24 U3.36 U3.48 | length 7586.4
  Top Layer w6: C15.1 2717.76,2317.24 2735,2300 C18.1 ; U3.9 2808.65,2094.65 2755.38,2041.38 C14.1 2735,2012.5 2704,1981.5 2704,1932.5 ; C13.2 2827.6,1762.4 2854,1736 2854,1660.5 2837.5,1644 2742.3,1644 ; U3.48 2852.52,2263 2843,2263 2842,2262 2842,2252.13 U3.1 2783.5,2252.13 2777,2258.62 C18.1 ; R3.2 3042.93,2375 3071,2403.07 3071,2454.5 3070,2455.5 U2.4 ; U3.24 3069.06,1999 3075,1999 3095,1979 C16.1 3095,1812.5 3107.5,1800 3221.5,1800 3234,1787.5 3234,1637.5 3221.5,1625 2761.3,1625 2742.3,1644 ; DS1.1 3076.34,2885.26 3092.6,2869 C1.2 ; U3.36 3132,2252.13 3137.12,2257.24 C17.1 3296.76,2257.24 v2(3312,2242) ; v2(3366,2250) 3366,2256 J3.1 3458,2262 3580,2262 ; U1.8 3381.73,2512.5 3244.23,2375 R2.2 3191.57,2462.5 3178.8,2475.28 U2.4 ; U1.13 3555.82,2565.32 ; C6.1 3666.62,2577.76 3663,2581.38 C8.1 3571.88,2581.38 3555.82,2565.32 ; 2704,1932.5 2704,1917.38 2705,1916.38 C19.1 2730,1809.7 2706.3,1786 J2.1 2742.3,1644 ; 2704,1932.5 2687.5,1916 2431.5,1916 2410,1937.5 2410,2266.59 2431.41,2288 2600,2288 2633,2255 R5.2 2688,2255 2691.62,2258.62 C18.1 ; U2.4 U2.2 3070,2771 3092.6,2793.6 C1.2 ; C1.2 3093,2830 3131,2868 3490.63,2868 3573.19,2868 3639.25,2801.94 3772,2669.19 3772,2428 3606,2262 3580,2262 ; 3555.82,2565.32 3553,2562.5 3553,2450 3632.51,2370.49 3632.51,2314.51 3580,2262
  Int1 (GND) w10: J2.1 2706.3,1712.3 3236,2242 v2(3312,2242) 3320,2250 v2(3366,2250)
+5: C3.2 C4.2 FB1.2 U2.3 | length 404.5
  Top Layer w6: C3.2 C4.2 2808,2605 2852.88,2649.88 FB1.2 2943.38,2649.88 2979.84,2686.34 U2.3
GND: C1.1 C2.1 C3.1 C4.1 C5.2 C6.2 C7.1 C8.2 C9.1 C10.1 C11.1 C12.2 C13.1 C14.2 C15.2 C16.2 C17.2 C18.2 C19.2 J1.5 J2.6 J3.5 R1.1 R4.2 R7.1 U1.1 U1.9 U1.11 U1.18 U1.25 U2.1 U3.8 U3.23 U3.35 U3.47 U3.49 Y1.2 Y1.4 | length 6521.2
  Top Layer w6: C12.2 2507.76,2195.37 2468.39,2156 Y1.4 2480,2112.99 2542.99,2050 Y1.2 2555,2014.08 2580.08,1989 ; J1.5 2688,2528.82 2707.6,2548.42 ; v2(2599,2014) 2580.08,1989 ; v2(2599,2173) 2720.5,2173 2735,2187.5 C18.2 ; C9.1 2655,1972.5 2637.5,1955 C11.1 2580.08,1989 ; v2(2683.38,2088.62) C14.2 ; C19.2 2775,1963.62 2791,1979.62 v2(2791,2014) ; U3.8 2857.53,2114.33 2872.2,2129 U3.49@2872.2,2240 ; C13.1 2902.4,1752.6 2966,1689 2966,1662.5 2984.5,1644 3162.43,1644 J2.6 3047.76,1830.67 C16.2 3047.76,1964 3049.37,1965.61 U3.23 3049.37,2048 3047,2050.37 2960.79,2050.37 v1(2960.79,2057.24) v1(2960.79,2100.55) v1(2960.79,2143.86) v1(2917.48,2143.86) 2882.2,2143.86 2882.2,2230 U3.49@2872.2,2240 ; R1.1 2838,2830 2784.8,2776.8 C2.1 2784.8,2687.3 2733.6,2636.1 2708.7,2636.1 C4.1 2707.6,2548.42 ; C1.1 3167.4,2785.24 3160.16,2778 U2.1 3160.16,2678.58 3175,2663.74 3294,2663.74 ; C17.2 3175,2172 3185,2162 R4.2 3241,2124.37 3242.97,2122.4 C10.1 ; U1.9 3401.42,2561 ; U1.18 3512.5,2663.74 ; J3.5 3538.49,2328.49 3538.49,2361 3537.49,2362 3537.49,2390.8 3440.79,2487.5 U1.11 3440.79,2561 3439.79,2562 3402.42,2562 3401.42,2561 ; C7.1 3532.4,2683.64 3512.76,2664 ; C5.2 3746,2510 3761,2525 3761,2624 3760,2625 C6.2 3666.62,2625 3663,2628.62 C8.2 3595,2650 3581.26,2663.74 3512.5,2663.74 ; 2707.6,2548.42 C3.1 2707.6,2462.4 2765,2405 C15.2 2808,2360 2813,2365 R7.1 2857.2,2328.01 2872.2,2313 U3.47 U3.49@2872.2,2240 ; 3294,2663.74 U1.1 3412,2663.74 3412,2614.53 U1.25 3411.26,2579.84 3401.42,2570 3401.42,2561 ; 3294,2663.74 3294,2664 3411.26,2664 3512.76,2664 ; 3512.5,2663.74 3512.76,2664
  Int1 (GND) w10: v2(2599,2014) v2(2791,2014)
  Int2 (PWR) w10: v2(2599,2014) v2(2599,2173) v2(2683.38,2088.62)
  Bottom Layer w6: v2(2599,2014) v2(2791,2014) 2864.43,2014 J2.6
  other v1: 2874.17,2057.24 2917.48,2057.24 3004.09,2057.24 3047.4,2057.24 2874.17,2100.55 2917.48,2100.55 3004.09,2100.55 3047.4,2100.55 2874.17,2143.86 3004.09,2143.86 3047.4,2143.86 2874.17,2187.17 2917.48,2187.17 2960.79,2187.17 3004.09,2187.17 3047.4,2187.17 2874.17,2230.47 2917.48,2230.47 2960.79,2230.47 3004.09,2230.47 3047.4,2230.47 3389.61,2592.87 3432.91,2592.87 3389.61,2636.18 3432.91,2636.18
IMU_CPOUT: C7.2 U1.20 | length 104.7
  Top Layer w6: U1.20 3440.79,2732 3457.6,2748.81 C7.2
IMU_INT: U1.12 U3.45 | length 814.3
  Top Layer w6: U3.45 2911.57,2308.57 2931,2328 v2(2931,2500) ; U1.12 3460.47,2512.53 v2(3473,2500)
  Int1 (GND) w10: v2(2931,2500) v2(3473,2500)
IMU_REGOUT: C5.1 U1.10 | length 315.3
  Top Layer w6: v2(3421.1,2458) U1.10 ; C5.1 3591,2510 v2(3591,2458)
  Int1 (GND) w10: v2(3421.1,2458) v2(3591,2458)
IMU_SCL: R2.1 U1.23 U3.42 | length 875.7
  Top Layer w6: U3.42 2970.63,2316.63 v2(2985,2331) ; R2.1 v2(3138.43,2418) ; U1.23 v2(3381.73,2762)
  Int2 (PWR) w10: v2(3138.43,2418) 3138.43,2637.43 3263,2762 v2(3381.73,2762)
  Bottom Layer w6: v2(2985,2331) 3002.05,2331 3089.05,2418 v2(3138.43,2418)
IMU_SDA: R3.1 U1.24 U3.43 | length 744.8
  Top Layer w6: U3.43 2950.94,2294 2957,2300.06 2957,2374 2958,2375 R3.1 v2(2983.43,2418) ; v2(3349.55,2732) 3362.05,2719.5 U1.24
  Bottom Layer w6: v2(2983.43,2418) 2998.92,2402.5 3058,2402.5 3349.55,2694.05 v2(3349.55,2732)
MCU_BOOT0: R7.2 U3.44 | length 528.8
  Top Layer w6: R7.2 2892.8,2540.1 2912.5,2559.8 2937.5,2559.8 2957,2540.3 2957,2462.5 2943,2448.5 2943,2315.74 2931.26,2304 U3.44
MCU_NRST: C12.1 J3.3 R5.1 U3.7 | length 2593
  Top Layer w6: v2(2450.5,2262.5) 2464.72,2276.72 2479.22,2276.72 ; R5.1 2609.6,2219.4 2589,2240 C12.1 2555,2265 2543.28,2276.72 2479.22,2276.72 ; U3.7 2762,2134.02 2761,2133.02 2761,2066 2760,2065 2694,2065 2680,2051 2680,1944.5 2662.5,1927 2444,1927 2421,1950 2421,2218.5 2479.22,2276.72 ; J3.3 3489,2281 3536.49,2281 3537.49,2282 3537.49,2298 3538.49,2299 3538.49,2302.4 3566.1,2330 v2(3595,2330)
  Int1 (GND) w10: v2(2450.5,2262.5) 2465.5,2277.5 3424.12,2277.5 3450.62,2251 3575,2251 3595,2271 v2(3595,2330)
MCU_OSC_IN: C11.2 U3.5 Y1.1 | length 880.5
  Top Layer w6: C11.2 2487.5,1955 2468.39,1974.11 Y1.1 2433,2050 2432,2051 2432,2154.01 2484.99,2207 2484.99,2264.71 2486,2265.72 2530,2265.72 2532,2263.72 2532,2214 2533,2213 2598,2213 2615,2196 2670,2196 2709,2235 2763,2235 2792.23,2205.77 2792.23,2187.5 2806.34,2173.39 U3.5
MCU_OSC_OUT: R6.2 U3.6 | length 172.8
  Top Layer w6: R6.2 2803,2151.67 2805.03,2153.7 U3.6
MCU_PA4: J2.2 U3.14 | length 402.2
  Top Layer w6: J2.2 2804.72,1804.28 2791,1818 2791,1962 2812.43,1983.43 2868.64,1983.43 2872.2,1987 U3.14
MCU_PA5: J2.3 U3.15 | length 356.1
  Top Layer w6: U3.15 2891.89,1982.89 2866,1957 2866,1717.15 J2.3
MCU_PA6: J2.4 U3.16 | length 367.3
  Top Layer w6: U3.16 2911.57,1990.43 2938,1964 2938,1743.57 J2.4
MCU_PA7: J2.5 U3.17 | length 399.9
  Top Layer w6: U3.17 2931.26,1993.74 2957,1968 2957,1823 J2.5
MCU_SWCLK: J3.4 U3.37 | length 470
  Top Layer w6: U3.37 3070.06,2296 3252,2296 3350,2394 3426,2394 J3.4
MCU_SWDIO: J3.2 U3.34 | length 422.2
  Top Layer w6: U3.34 3111,2212.76 3132.24,2234 3268.69,2234 3286.2,2216.49 3325,2216.49 3340.24,2231.73 3340.24,2263.47 3399.56,2322.78 3399.56,2339.56 J3.2
MCU_SWO: J3.6 U3.39 | length 1041.9
  Top Layer w6: U3.39 3029.69,2302 3010.5,2321.19 3010.5,2406.5 3033,2429 v2(3045.5,2429) ; v2(3479,2391) J3.6
  Bottom Layer w6: v2(3045.5,2429) 3031,2443.5 2965,2443.5 2925,2403.5 2925,2340.5 2960,2305.5 3028.76,2305.5 3114.26,2391 v2(3479,2391)
MCU_VCAP1: C10.2 U3.22 | length 931.4
  Top Layer w6: v2(3013.79,1951) 3029.69,1966.9 U3.22 ; C10.2 3351.6,2047.6 v2(3352,2048) 3352,1960 v3(3305,1960)
  Int1 (GND) w10: v2(3013.79,1951) 3110.79,2048 v2(3352,2048)
  Bottom Layer w6: v2(3013.79,1951) 3013.79,1960 v3(3305,1960)
NetDS1_2: DS1.2 R1.2 | length 98.8
  Top Layer w6: R1.2 2984.37,2872 2993.66,2881.29 DS1.2
NetDS2_1: DS2.1 U3.26 | length 174
  Top Layer w6: U3.26 3112.5,2055.28 3125.22,2042.55 3125.22,2012.78 3175,1963 DS2.1
NetDS2_2: DS2.2 R4.1 | length 140.1
  Top Layer w6: R4.1 3185,2008.09 3232.09,1961 DS2.2
USB_D_N: J1.2 U3.32 | length 2517.4
  Top Layer w15: J1.2 2550,2605.59 2496.41,2552 2422.5,2552 2394,2523.5 2394,1837 2628.5,1602.5 3237.5,1602.5 3250,1615 3250,1827 3203,1874 3203,1957 3143.95,2016.05 3143.95,2173.39 U3.32
USB_D_P: J1.3 U3.33 | length 750.7
  Top Layer w15: J1.3 v2(2631,2580) ; U3.33 v2(3133,2193.07)
  Bottom Layer w15: v2(2631,2580) 2966,2245 3081.07,2245 v2(3133,2193.07)
VBUS: C2.2 FB1.1 J1.1 | length 626.7
  Top Layer w6: J1.1 2540,2631.18 2539,2632.18 2539,2712.5 2551.5,2725 C2.2 v2(2710,2777) ; FB1.1 v2(2918,2705)
  Int1 (GND) w10: v2(2710,2777) 2782,2705 v2(2918,2705)
XTAL_IN: C9.2 R6.1 Y1.3 | length 172.9
  Top Layer w6: Y1.3 2601,2112.99 2608.01,2120 R6.1 C9.2
pads on no net: J1.4 J1.6 J1.7 J1.8 J1.9 J1.10 J1.11 J3. U1.2 U1.3 U1.4 U1.5 U1.6 U1.7 U1.14 U1.15 U1.16 U1.17 U1.19 U1.21 U1.22 U3.2 U3.3 U3.4 U3.10 U3.11 U3.12 U3.13 U3.18 U3.19 U3.20 U3.21 U3.25 U3.27 U3.28 U3.29 U3.30 U3.31 U3.38 U3.40 U3.41 U3.46
copper on no net: | length 6290.6
  Top Layer w10: 2265,1400 ccw(c2315,1400) 2315,1350 3770,1350 ccw(c3770,1400) 3820,1400 3820,2930 ccw(c3770,2930) 3770,2980 2300,2980 ccw(c2300,2945) 2265,2945 2265,1400

## Polygon pours and split planes (outlines as drawn)
GND on Int2 (PWR) "GND_L03_P001" (solid, pour order 1): 2265,2945 cw(c2300,2945) 2300,2980 3770,2980 cw(c3770,2930) 3820,2930 3820,1400 cw(c3770,1400) 3770,1350 2315,1350 cw(c2315,1400) 2265,1400
GND on Int1 (GND) "GND_L02_P000" (solid, pour order 0): 2265,2945 cw(c2300,2945) 2300,2980 3770,2980 cw(c3770,2930) 3820,2930 3820,1405 cw(c3765,1405) 3765,1350 2315,1350 cw(c2315,1400) 2265,1400

## Silkscreen, mask and mechanical layers (free items; w line width, h text height)
Top Overlay:
  text "STM 32" at 3535,1605 h80 r90
  text "PCB Board" at 3690,1540 h70 r90